# EAGLE board SAMD_Test_Board_old (EAGLE 9.6.2)
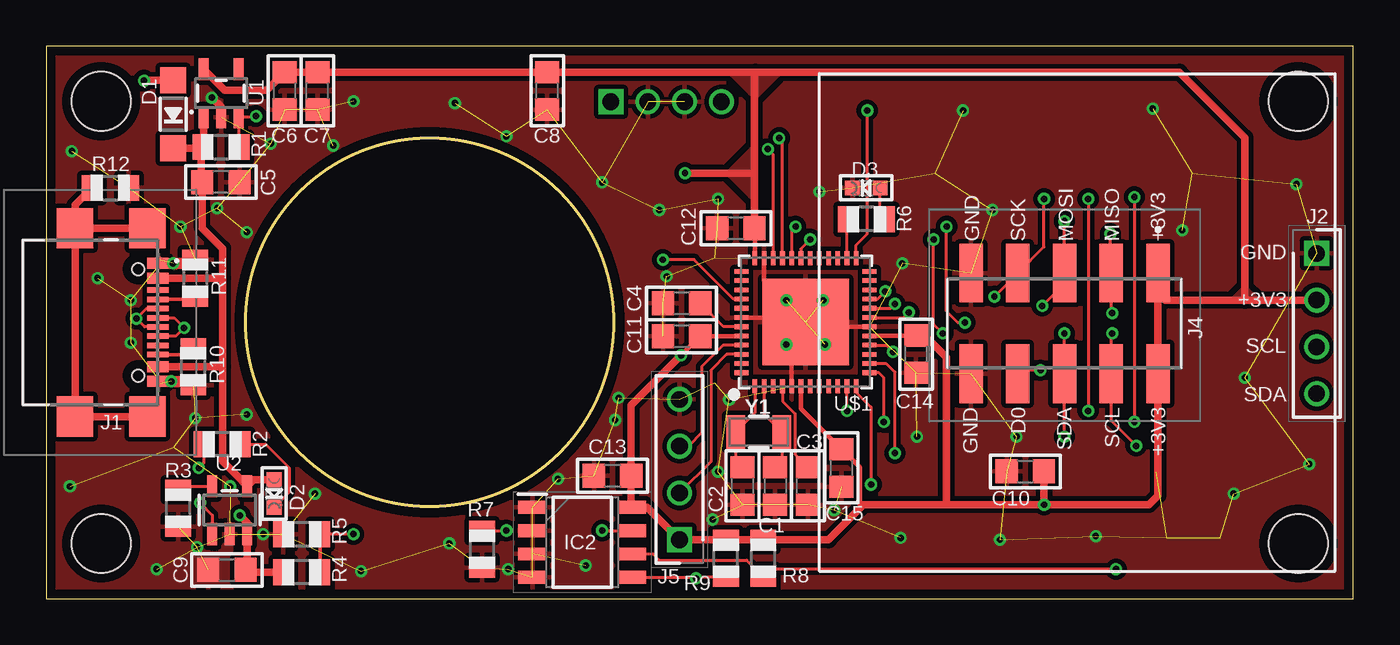
[diagram p0: board, top side]
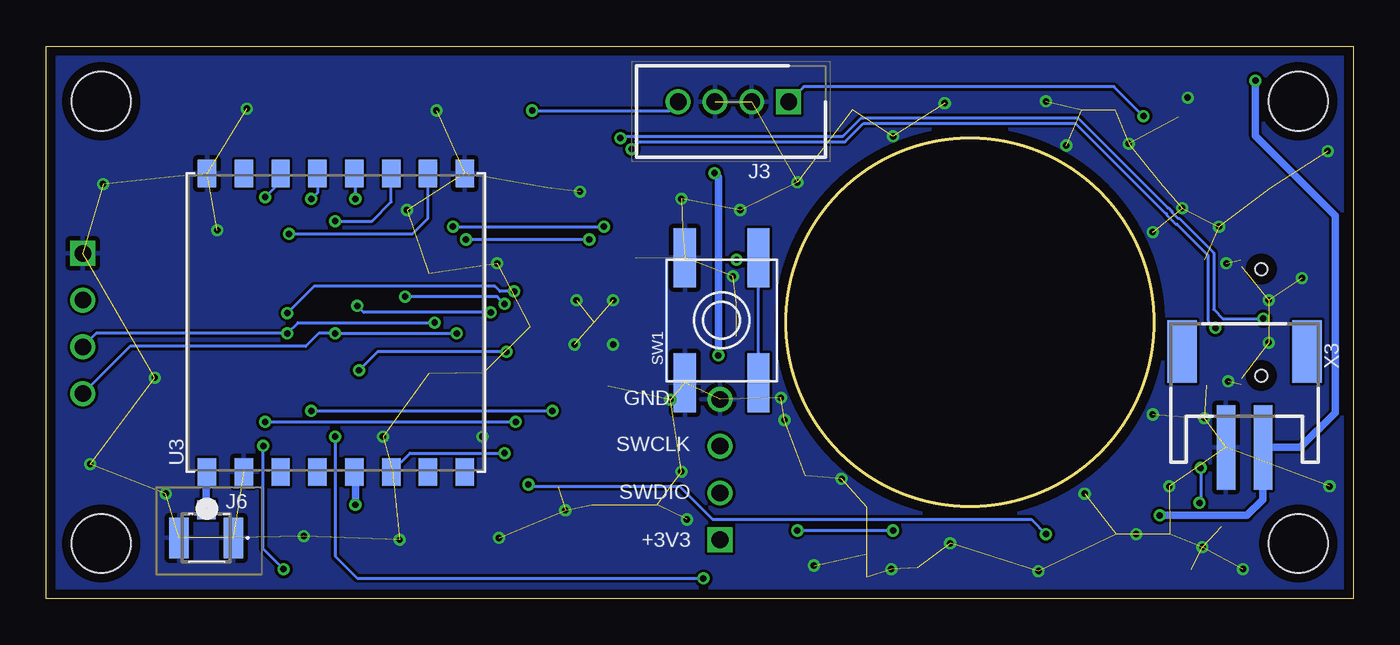
[diagram p1: board, bottom side, seen from below]

Size 71 x 30 mm. Coordinates in mm from the lower left corner, seen from the top.
Outline: 0,0 71,0 71,30 0,30 0,0
Outline: circle at 20.83,15 radius 10
Copper layers (1*16): Top 0.035mm / dielectric 1.6mm / Bottom 0.035mm
Design rules "Elecrow_2-layer_PCB_eagle_rule": minimum track width 6mil, minimum drill 12mil, track to track 6mil, track to pad 6mil, pad to pad 6mil, via to via 8mil, smd to smd 0mil, copper to edge 20mil, drill to drill 10mil, minimum pad ring 6mil, minimum via ring 6mil, stop-mask expansion 0mil, vias tented up to drill 100mil, thermal gap 10mil
Net classes: 0 default: width 0.152 mm; 1 USB_Diff_pair: width 0.152 mm; 2 Power: width 0.254 mm
Holes 3.2 mm at 3,3 3,27 68,27 68,3
tKeepout: area 0,24 to 6,30; area 0,0 to 6,6; area 65,24 to 71,30; area 65,0 to 71,6

## Footprints (pad centres in the part's own frame; a part is rotated, then mirrored left to right if it is on the bottom)
MICROBUILDER__0805 = smd 1.2 x 1.3: 1 -1.016,0; 2 1.016,0
MICROBUILDER_SOD-123 = smd 1.4 x 1.4: A 1.85,0; C -1.85,0
MICROBUILDER_CHIPLED_0603 = smd 0.8 x 0.8: A 0,-0.75; C 0,0.75
SOIC127P600X175-8N = smd 1.525 x 0.7: 1 -2.712,1.905; 2 -2.712,0.635; 3 -2.712,-0.635; 4 -2.712,-1.905; 5 2.712,-1.905; 6 2.712,-0.635; 7 2.712,0.635; 8 2.712,1.905
USB4110GFA = smd 0.3 x 1.15: A1 -3.35,3.678; A4 -2.55,3.678; A5 -1.25,3.678; A6 -0.25,3.678; A7 0.25,3.678; A8 1.25,3.678; A9 2.55,3.678; A12 3.35,3.678; B1 3.05,3.678; B4 2.25,3.678; B5 1.75,3.678; B6 0.75,3.678; B7 -0.75,3.678; B8 -1.75,3.678; B9 -2.25,3.678; B12 -3.05,3.678 | smd 2.18 x 2: MP1 -5.11,-0.827; MP2 5.11,-0.827; MP3 -5.11,3.103; MP4 5.11,3.103 | hole 0.65: -2.89,2.603; 2.89,2.603
RHDR4W70P0X254_1X4_1016X244X87 = drill 0.9 pad 1.35 square: 1 0,0 | drill 0.9 pad 1.35: 2 2.54,0; 3 5.08,0; 4 7.62,0
SHDR4W50P0X200_1X4_1000X470X63 = drill 0.9 pad 1.35 square: 1 0,0 | drill 0.9 pad 1.35: 2 2,0; 3 4,0; 4 6,0
10129383910001ALF = smd 1.27 x 3.18: A1 -5.08,-2.73; A2 -2.54,-2.73; A3 0,-2.73; A4 2.54,-2.73; A5 5.08,-2.73; B1 -5.08,2.73; B2 -2.54,2.73; B3 0,2.73; B4 2.54,2.73; B5 5.08,2.73
UFLRSMT10 = smd 1.05 x 2.2: 1 -1.475,0; 2 1.475,0 | smd 1 x 1.05: 3 0,-1.525
R0805 = smd 1.1 x 1.4: 1 -1,0; 2 1,0
ADAFRUIT_EVQ-Q2 = smd 3.2 x 1.2: A -3.4,-2; A' 3.4,-2; B -3.4,2; B' 3.4,2
SOT23-5 = smd 0.55 x 1.2: 1 -0.95,-1.3; 2 0,-1.3; 3 0.95,-1.3; 4 0.95,1.3; 5 -0.95,1.3
MICROBUILDER_SOT23-5 = smd 0.55 x 1.2: 1 -0.95,-1.3; 2 0,-1.3; 3 0.95,-1.3; 4 0.95,1.3; 5 -0.95,1.3
MICROBUILDER_RFMHCW_SMT = smd 1.5 x 1: 1P 8.1,-7; 2P 8.1,-5; 3P 8.1,-3; 4P 8.1,-1; 5P 8.1,1; 6P 8.1,3; 7P 8.1,5; 8P 8.1,7; 9P -8.1,7; 10P -8.1,5; 11P -8.1,3; 12P -8.1,1; 13P -8.1,-1; 14P -8.1,-3; 15P -8.1,-5; 16P -8.1,-7
MICROBUILDER_TQFN48_7MM = smd 0.25 x 0.75: 1 -2.75,-3.475; 2 -2.25,-3.475; 3 -1.75,-3.475; 4 -1.25,-3.475; 5 -0.75,-3.475; 6 -0.25,-3.475; 7 0.25,-3.475; 8 0.75,-3.475; 9 1.25,-3.475; 10 1.75,-3.475; 11 2.25,-3.475; 12 2.75,-3.475; 25 2.75,3.475; 26 2.25,3.475; 27 1.75,3.475; 28 1.25,3.475; 29 0.75,3.475; 30 0.25,3.475; 31 -0.25,3.475; 32 -0.75,3.475; 33 -1.25,3.475; 34 -1.75,3.475; 35 -2.25,3.475; 36 -2.75,3.475 | smd 0.75 x 0.25: 13 3.475,-2.75; 14 3.475,-2.25; 15 3.475,-1.75; 16 3.475,-1.25; 17 3.475,-0.75; 18 3.475,-0.25; 19 3.475,0.25; 20 3.475,0.75; 21 3.475,1.25; 22 3.475,1.75; 23 3.475,2.25; 24 3.475,2.75; 37 -3.475,2.75; 38 -3.475,2.25; 39 -3.475,1.75; 40 -3.475,1.25; 41 -3.475,0.75; 42 -3.475,0.25; 43 -3.475,-0.25; 44 -3.475,-0.75; 45 -3.475,-1.25; 46 -3.475,-1.75; 47 -3.475,-2.25; 48 -3.475,-2.75 | smd 4.7 x 4.7: THERMAL 0,0
MICROBUILDER_JSTPH2 = smd 1 x 4.6: 1 -1,-3.7; 2 1,-3.7 | smd 1.6 x 3.4: NC1 -3.4,1.5; NC2 3.4,1.5
CRYSTAL-SMD-3.2X1.5MM = smd 1 x 1.8: P$1 -1.25,0; P$2 1.25,0

## Placement (x,y rotation side)
C1  22pF  [MICROBUILDER__0805]  39.59,6.12 270 top
C2  22pF  [MICROBUILDER__0805]  37.81,6.12 270 top
C3  1uF  [MICROBUILDER__0805]  41.37,6.12 90 top
C4  1uF  [MICROBUILDER__0805]  34.51,16.03 180 top
C5  10uF  [MICROBUILDER__0805]  9.5,22.61 180 top
C6  10uF  [MICROBUILDER__0805]  12.96,27.57 90 top
C7  1uF  [MICROBUILDER__0805]  14.74,27.57 90 top
C8  10uF  [MICROBUILDER__0805]  27.22,27.57 90 top
C9  10uF  [MICROBUILDER__0805]  9.82,1.56 0 top
C10  10uF  [MICROBUILDER__0805]  53.18,6.91 0 top
C11  0.1uF  [MICROBUILDER__0805]  34.51,14.25 0 top
C12  0.1uF  [MICROBUILDER__0805]  37.46,20.11 0 top
C13  0.1uF  [MICROBUILDER__0805]  30.76,6.68 0 top
C14  0.1uF  [MICROBUILDER__0805]  47.25,13.27 90 top
C15  0.1uF  [MICROBUILDER__0805]  43.2,7.1 90 top
D1  MBR120  [MICROBUILDER_SOD-123]  6.91,26.3 90 top
D2  [MICROBUILDER_CHIPLED_0603]  12.39,5.71 180 top
D3  [MICROBUILDER_CHIPLED_0603]  44.55,22.3 90 top
IC2  CAT24C512WI-GT3  [SOIC127P600X175-8N]  29.12,3.06 0 top
J1  USB4110-GF-A  [USB4110GFA]  2.4,15 270 top
J2  90147-1104  [RHDR4W70P0X254_1X4_1016X244X87]  69,18.75 270 top
J3  M22-2200445  [SHDR4W50P0X200_1X4_1000X470X63]  30.68,26.98 180 bottom
J4  10129383-910001ALF  [10129383910001ALF]  55.31,14.94 180 top
J5  90147-1104  [RHDR4W70P0X254_1X4_1016X244X87]  34.4,3.2 90 top
J6  U.FL-R-SMT_10_  [UFLRSMT10]  62.3,3.3 180 bottom
R1  100k  [R0805]  9.5,24.52 0 top
R2  1k  [R0805]  9.56,8.38 180 top
R3  10k  [R0805]  7.18,4.91 90 top
R4  100k  [R0805]  13.88,1.44 180 top
R5  100k  [R0805]  13.88,3.5 0 top
R6  2.2K  [R0805]  44.55,20.6 180 top
R7  10k  [R0805]  23.68,2.69 90 top
R8  2.2k  [R0805]  38.95,2.2 90 top
R9  2.2k  [R0805]  36.92,2.2 90 top
R10  5.11K  [R0805]  8,12.6 90 top
R11  5.11K  [R0805]  8.1,17.4 270 top
R12  1M  [R0805]  3.5,22.3 0 top
SW1  ADAFRUIT_SPST_TACT-EVQQ2  [ADAFRUIT_EVQ-Q2]  34.31,15.11 270 bottom
U1  3.3V  [SOT23-5]  9.5,27.44 0 top
U2  MCP73831/2  [MICROBUILDER_SOT23-5]  9.97,4.81 0 top
U3  RFM95  [MICROBUILDER_RFMHCW_SMT]  55.26,14.98 270 bottom
U$1  MICROBUILDER_ATSAMD21J_QFN  [MICROBUILDER_TQFN48_7MM]  41.24,15.01 0 top
X3  [MICROBUILDER_JSTPH2]  5.92,11.91 0 bottom
Y1  32.768kHz  [CRYSTAL-SMD-3.2X1.5MM]  38.7,9.04 0 top

## Library data of the parts
C1-C15 D1-D3 R1-R7 R9-R12 SW1 U2 U3 U$1 X3 = Adafruit Feather M0 RFMxx
IC2 = SamacSys_Parts; DESCRIPTION: EEPROM,512kbit,64Kx8,1MHz I2C,SOIC8 ON Semiconductor CAT24C512WI-GT3 EEPROM Memory, 512kb, 400ns, 1.8 5.5 V 8-Pin SOIC; HEIGHT: 1.75mm; MANUFACTURER_NAME: ON Semiconductor; MANUFACTURER_PART_NUMBER: CAT24C512WI-GT3; MOUSER_PART_NUMBER: 863-CAT24C512WI-GT3; MOUSER_PRICE-STOCK: https://www.mouser.co.uk/ProductDetail/ON-Semiconductor/CAT24C512WI-GT3?qs=NJQfjRgVp6ROyXrGKjEjgQ%3D%3D
J1 = SamacSys_Parts; DESCRIPTION: CONN USB 2.0 TYPE-C R/A SMT; HEIGHT: 3.26mm; MANUFACTURER_NAME: GCT (GLOBAL CONNECTOR TECHNOLOGY); MANUFACTURER_PART_NUMBER: USB4110-GF-A; MOUSER_PART_NUMBER: 640-USB4110-GF-A; MOUSER_PRICE-STOCK: https://www.mouser.co.uk/ProductDetail/GCT/USB4110-GF-A?qs=KUoIvG%2F9IlYiZvIXQjyJeA%3D%3D
J2 J5 = SamacSys_Parts; DESCRIPTION: Headers & Wire Housings 2.54MM 4P PCB CONN SR VERTICAL; HEIGHT: 8.7mm; MANUFACTURER_NAME: Molex; MANUFACTURER_PART_NUMBER: 90147-1104; MOUSER_PART_NUMBER: 538-90147-1104; MOUSER_PRICE-STOCK: https://www.mouser.co.uk/ProductDetail/Molex/90147-1104?qs=QESXi79X%252BKpRACDRmfEx7Q%3D%3D
J3 = SamacSys_Parts; DESCRIPTION: 4 SIL VERT SHROUDED PIN HDR ROHS COMPLIANT: YES; HEIGHT: 6.35mm; MANUFACTURER_NAME: Harwin; MANUFACTURER_PART_NUMBER: M22-2200445; MOUSER_PART_NUMBER: 855-M22-2200445; MOUSER_PRICE-STOCK: https://www.mouser.co.uk/ProductDetail/Harwin/M22-2200445/?qs=p%252BybrH12zCH0J5aaSlth2Q%3D%3D
J4 = SamacSys_Parts; DESCRIPTION: EconoStik, Board to Board connector, Unshrouded Vertical Header, Surface Mount, Double Row, Positions, 2.54 mm (0.100in) Pitch.; HEIGHT: 9.85mm; MANUFACTURER_NAME: Amphenol; MANUFACTURER_PART_NUMBER: 10129383-910001ALF; MOUSER_PART_NUMBER: 649-1012938391001ALF; MOUSER_PRICE-STOCK: https://www.mouser.co.uk/ProductDetail/Amphenol-FCI/10129383-910001ALF?qs=0lQeLiL1qyY3dF%252BDHWxqLA%3D%3D
J6 = SamacSys_Parts; DESCRIPTION: RF Connectors / Coaxial Connectors U.FL RECEPTACLE SMT GLD M CONT REEL; HEIGHT: 1.25mm; MANUFACTURER_NAME: Hirose; MANUFACTURER_PART_NUMBER: U.FL-R-SMT(10); MOUSER_PART_NUMBER: 798-U.FL-R-SMT10; MOUSER_PRICE-STOCK: https://www.mouser.co.uk/ProductDetail/Hirose-Connector/UFL-R-SMT10?qs=Ux3WWAnHpjBT1CWD8UMEMQ%3D%3D
R8 = Adafruit Feather M0 RFMxx; MOUSER: CR0805-JW-202ELF
U1 = SamacSys_Parts; PROD_ID: VREG-12457
Y1 = SparkFun-Clocks; PROD_ID: XTAL-13062

## Nets
!RESET: SW1.B SW1.B' U$1.40
+3V3 [Power]: C6.2 C7.2 C8.2 C10.2 C11.2 C12.2 C13.2 C14.2 C15.2 IC2.8 J2.2 J4.A1 J4.B1 J5.1 R8.2 R9.2 U1.5 U3.5P U$1.6 U$1.17 U$1.36 U$1.44
A0: U$1.3
A1: U$1.7
A2: U$1.8
A3: U$1.9
A4: U$1.10
A5: U$1.47
AREF: C3.2 U$1.4
D0: J4.B4 U$1.16
D1: U$1.15
D2: U$1.23
D3_IRQ: U3.6P U$1.14
D4_RST: U3.14P U$1.13
D5: U$1.24
D6: U$1.29
D7: U$1.30
D8_CS: U3.13P U$1.11
D9: R4.1 R5.2 U$1.12
D10: U$1.27
D11: J3.4 U$1.25
D12: U$1.28
D13: R6.2 U$1.26
DIO1: U3.7P
DIO2: U3.8P
DIO3: U3.3P
DIO4: U3.4P
DIO5: U3.15P
EN: J3.1 R1.2 U1.3
GND [Power]: C1.2 C2.2 C3.1 C4.2 C5.1 C6.1 C7.1 C8.1 C9.1 C10.1 C11.1 C12.1 C13.1 C14.1 C15.1 D3.C IC2.1 IC2.2 IC2.3 IC2.4 J1.A1 J1.A12 J1.B1 J1.B12 J2.1 J3.2 J3.3 J4.A5 J4.B5 J5.4 J6.1 J6.2 R3.1 R5.1 R7.1 R10.1 R11.1 R12.2 SW1.A SW1.A' U1.2 U2.2 U3.2P U3.9P U3.16P U$1.5 U$1.18 U$1.35 U$1.42 U$1.THERMAL X3.1
MISO: J4.A2 U3.10P U$1.21
MOSI: J4.A3 U3.11P U$1.19
N$1: C2.1 U$1.1 Y1.P$1
N$2: C1.1 U$1.2 Y1.P$2
N$3: IC2.7 R7.2
N$4: C4.1 U$1.43
N$5: J1.A5 R11.2
N$6: D2.C R2.1
N$7: R2.2 U2.1
N$8: R3.2 U2.5
N$9: J1.B5 R10.2
N$10: J1.MP1 J1.MP2 J1.MP3 J1.MP4 R12.1
N$12: D3.A R6.1
N$13: J6.3 U3.1P
PA13: U$1.22
RXD: U$1.38
RXLED: U$1.48
SCK: J4.A4 U3.12P U$1.20
SCL: IC2.6 J2.3 J4.B2 R8.1 U$1.32
SDA: IC2.5 J2.4 J4.B3 R9.1 U$1.31
SWCLK: J5.3 U$1.45
SWDIO: J5.2 U$1.46
TXD: U$1.37
TXLED: U$1.39
USBD_N [USB_Diff_pair]: J1.A7 J1.B7 U$1.33
USBD_P [USB_Diff_pair]: J1.A6 J1.B6 U$1.34
USBHOSTEN: U$1.41
VBAT [Power]: C9.2 D1.A R4.2 U2.3 X3.2
VBUS [Power]: C5.2 D1.C D2.A J1.A4 J1.A9 J1.B4 J1.B9 R1.1 U1.1 U2.4

## Tracks (layer width: path | path; a pad name or v marks a point on that pad's centre or on a via)
!RESET  (via drill 0.35)
  Top 0.152: U$1.40 37.34,16.26 35.2,18.4 v33.5,18.4
  Bottom 0.152: v33.5,18.4 32.42,18.4 | 32.42,18.4 32.51,18.31 32.31,18.11 SW1.B' | 32.42,18.4 SW1.B
+3V3  (via drill 0.35)
  Top 0.254: U$1.17 47.23,14.26 C14.2 | U$1.44 37.76,14.25 C11.2 v34.49,13.21 | U$1.6 40.99,10.32 C15.2 44.19,7.12 44.19,5.95 44.2,5.94 44.2,4.9 | U$1.36 38.49,20.1 C12.2 | 38.48,28.57 38.5,28.59
  Top 0.406: U1.5 9.69,27.6 11.97,27.6 C6.2 C7.2 C8.2 38.5,28.59 61.54,28.59 65.1,25.03 65.1,16.2 | J4.A1 60.39,16.6 | 60.39,16.6 J4.B1 60.39,5.59 59.9,5.1 v54.2,5.1 | v54.2,5.1 C10.2 | 48.9,5.1 48.9,13.1 47.74,14.26 47.23,14.26 | v54.2,5.1 48.9,5.1 | 48.9,5.1 44.4,5.1 44.2,4.9 42.5,3.2 R8.2 R9.2 J5.1 32.63,4.97 IC2.8 31.78,5.02 C13.2 31.78,10.5 v34.49,13.21 | 65.1,16.2 60.79,16.2 60.39,16.6 | C12.2 38.48,23.1 | 38.48,23.1 38.48,28.57 | J2.2 65.11,16.21 65.1,16.2 | 38.48,23.1 v34.7,23.1
  Bottom 0.406: U3.5P 54.2,6.82 v54.2,5.1 | v34.7,23.1 34.49,22.89 v34.49,13.21
  pour Top: 65.1,17 64.3,16.2 65.8,16.2 65.9,16.2
  pour Top: 38.5,27.2 39.9,28.6 37.3,28.6 37.1,28.6
  pour Top (no thermals): 38.5,21.6 37,23.1 38.5,24.6
AREF
  Top 0.152: U$1.4 39.99,10.73 40.68,10.04 40.68,7.83 C3.2
D0  (via drill 0.35)
  Top 0.152: U$1.16 45.64,13.76 v46,13.4 | v54,12.4 52.96,12.4 J4.B4
  Bottom 0.152: v46,13.4 53,13.4 v54,12.4
D3_IRQ  (via drill 0.35)
  Top 0.152: v46.1,7.9 46.1,12.3 45.64,12.76 U$1.14
  Bottom 0.152: U3.6P 51.24,7.9 v46.1,7.9
D4_RST  (via drill 0.35)
  Top 0.152: v59.1,21.8 v59.1,9.6 | v45.5,9.6 45.5,12 45.24,12.26 U$1.13
  Bottom 0.152: U3.14P 58.26,22.64 v59.1,21.8 | v59.1,9.6 v45.5,9.6
D8_CS  (via drill 0.35)
  Top 0.152: v43.5,10.2 U$1.11 | v56.6,21.7 v56.6,10.2
  Bottom 0.152: U3.13P 56.26,22.04 v56.6,21.7 | v56.6,10.2 v43.5,10.2
D9  (via drill 0.35)
  Top 0.152: U$1.12 43.99,11.21 44.8,10.4 v44.8,6.2 | v16.7,3.5 R5.2
  Top 0.203: R4.1 R5.2
  Bottom 0.152: v44.8,6.2 44.7,6.1 36.6,6.1 34.8,4.3 17.5,4.3 v16.7,3.5
D11  (via drill 0.35)
  Top 0.152: U$1.25 43.99,19.19 44.6,19.8 v44.6,26.5
  Bottom 0.152: v44.6,26.5 37.15,26.5 J3.4
D13
  Top 0.152: U$1.26 43.49,20.55 R6.2
EN  (via drill 0.35)
  Top 0.152: v11.4,26.2 11.34,26.14 U1.3 10.45,24.57 R1.2
  Bottom 0.152: v11.4,26.2 13,27.8 29.85,27.8 J3.1
GND  (via drill 0.35)  (97 unrouted)
  Top 0.254: U$1.42 40.99,15.26 U$1.THERMAL | U$1.18 41.49,14.76 U$1.THERMAL | U$1.35 38.99,17.26 U$1.THERMAL | U$1.5 40.49,13.51 v40.2,13.8 40.2,13.97 U$1.THERMAL
  Top 0.305: J1.B12 7.75,18.05 | J1.A1 7.95,18.35 8,18.3 | J1.A12 7.95,11.65 | 7.95,11.65 R10.1 | J1.B1 7.65,11.95 7.95,11.65
  Top 0.406: U1.2 9.5,26.7 v9,27.2 | 6.13,18.4 J1.A1 | 7.75,18.05 8,18.3 R11.1
  other vias: 10,6.1 8.1,9.8 4.6,13.9 7.3,20.2 4.6,16.2 25.1,1.6 9.3,21.2 1.4,24.3 12.2,24.7 8.2,2.8 1.3,6.1 11.8,3.5 40.2,16.2 42.2,16.2 42.3,13.8 33.7,17.5 25,25.1 15.6,24.6 30.2,22.6 31.1,10.9 36.5,21.7 46.5,18.2 42.8,4.8 52.7,8.8 61.7,20 51.4,21.1 67.9,22.5 60.1,26.6 49.8,26.5 65.1,12 68.6,7.3 64.5,5.7 57,3.4 51.8,3.2 46.4,3.3 47.3,8.8 14.6,5.7 10.9,10 30.9,9.7 27.8,6.5 21.9,3 17.1,1.5 29.3,1.8 6,1.6 2.8,17.4 6.8,11.8 6.9,18.2 36.2,4.3 36.5,6.9 37.1,10.8 33.3,21.1 42,22.1 16.7,27 22.2,26.9 10.9,19.9
  pour Top (isolate 0.254, rank 6): 0,30 0,0 71,0 71,30
  pour Bottom (rank 6): 0,30 0,0 71,0 71,30
  pour Top (no thermals): 9.8,3.1 9.6,2.9 9.6,2.7 9.4,2.5 7.9,2.5 7.9,0.7 9.9,0.7 9.9,2.3 10.1,2.5 10.1,3.1
MISO  (via drill 0.35)
  Top 0.152: v57.8,19.8 57.8,17.72 J4.A2 57.85,15.55 v57.9,15.5 | U$1.21 45.15,16.26 v45.57,16.69
  Bottom 0.152: v57.8,19.8 51.1,19.8 50.26,20.64 U3.10P | v45.57,16.69 46.36,16.69 46.62,16.96 56.44,16.96 v57.9,15.5
MOSI  (via drill 0.35)
  Top 0.152: v55.3,20.5 v55.31,20.49 J4.A3 55.31,17.11 v54.1,15.9 | U$1.19 46.58,15.26 v46.86,15.54
  Bottom 0.152: v55.3,20.5 53.3,20.5 52.26,21.54 U3.11P | v46.86,15.54 53.74,15.54 v54.1,15.9
N$1
  Top 0.152: U$1.1 38.49,10.09 Y1.P$1 37.45,7.5 C2.1
N$2
  Top 0.152: U$1.2 38.99,10.01 Y1.P$2 39.95,7.5 C1.1
N$3  (via drill 0.35)
  Top 0.152: R7.2 24.99,3.69 v25,3.7 | v30.2,3.7 IC2.7
  Bottom 0.152: v25,3.7 v30.2,3.7
N$4
  Top 0.152: U$1.43 36.8,14.76 C4.1
N$5
  Top 0.2: J1.A5 7.95,16.25 R11.2
N$6
  Top 0.152: R2.1 11.92,8.38 13.2,7.1 13.2,5.77 D2.C
  Top 0.203: 12.65,4.7 D2.C
N$7  (via drill 0.35)
  Top 0.152: R2.2 8.56,7.36 v8.3,7.1 | v8.36,5.2 9.02,4.54 U2.1
  Bottom 0.152: v8.3,7.1 8.3,5.26 v8.36,5.2
N$8
  Top 0.152: R3.2 7.38,6.11 U2.5
N$9
  Top 0.2: J1.B5 7.65,13.25 R10.2
N$10
  Top 0.406: J1.MP4 J1.MP2 J1.MP1 | J1.MP3 J1.MP1 | R12.1 1.57,21.37 J1.MP1
N$12
  Top 0.152: R6.1 45.3,20.85 D3.A
N$13
  Bottom 0.406: J6.3 62.3,6.84 U3.1P
SCK  (via drill 0.35)
  Top 0.152: v54.2,21.7 54.2,19.1 J4.A4 v51.5,16.4 | U$1.20 45.86,15.76 v46.1,16
  Bottom 0.152: v54.2,21.7 54.2,23.02 U3.12P | v46.1,16 46.5,16.4 v51.5,16.4
SCL  (via drill 0.35)
  Top 0.152: v57.9,14.4 57.85,14.35 J4.B2 57.85,9.65 v59.2,8.3 | v49.9,14.99 49.51,14.99 48.9,15.6 v48.9,20.2 | v40.7,20.2 40.49,19.99 U$1.32 | IC2.6 32.97,2.43 33.3,2.1 38.05,2.1 R8.1 39.35,1.6 v58.1,1.6
  Bottom 0.152: J2.3 68.27,14.4 v57.9,14.4 57.31,14.99 v49.9,14.99 | v59.2,8.3 59.2,2.7 v58.1,1.6 | v48.9,20.2 v40.7,20.2
SDA  (via drill 0.35)
  Top 0.152: v55.3,14.4 v55.31,14.39 J4.B3 v55.3,8.8 | 37.38,1.2 R9.1 36.88,1.16 35.24,1.16 | v48.7,14.4 48.2,14.9 v48.2,19.5 | v41.5,19.5 40.99,18.99 U$1.31 | IC2.5 35.24,1.16 | 35.24,1.16 v35.3,1.1
  Bottom 0.152: J2.4 66.43,13.7 56.9,13.7 56.2,14.4 v55.3,14.4 v48.7,14.4 | v55.3,8.8 55.3,2.3 54.1,1.1 v35.3,1.1 | v48.2,19.5 v41.5,19.5
SWCLK
  Top 0.152: U$1.45 36.76,13.76 35.6,12.6 35.6,9 34.88,8.28 J5.3
SWDIO
  Top 0.152: U$1.46 36.96,13.26 36.1,12.4 36.1,7.44 J5.2
USBD_N  (via drill 0.35)
  Top 0.152: v39.81,25.01 39.99,24.82 U$1.33 | J1.A7 5.35,14.75 v4.9,15.2 5.45,15.75 J1.B7
  Bottom 0.152: v39.81,25.01 39.71,25.11 27.73,25.11 26.73,26.11 14.97,26.11 10.08,21.21 10.04,21.21 9.86,21.04 | 9.86,21.04 | v4.9,15.2 7.09,15.2 7.59,15.7 7.59,18.77 9.46,20.64 9.53,20.64 9.86,20.97 9.86,21.02 9.86,21.04
USBD_P  (via drill 0.35)
  Top 0.152: v39.2,24.4 39.49,24.11 U$1.34 | J1.B6 7.05,14.25 v7.5,14.7 6.95,15.25 J1.A6
  Bottom 0.152: v39.2,24.4 38.8,24.8 27.6,24.8 26.6,25.8 15.1,25.8 10.16,20.86 | 10.16,20.91 10.16,20.86 | v7.5,14.7 7.9,15.1 7.9,18.65 9.59,20.34 9.66,20.34 10.11,20.79 10.16,20.84 10.16,20.86
VBAT  (via drill 0.35)
  Top 0.406: R4.2 10.96,1.44 C9.2 10.92,1.65 U2.3 10.92,4.11 v10.52,4.52 | 6.75,28.3 D1.A 5.35,28.15 v5.32,28.12
  Bottom 0.406: v10.52,4.52 5.78,4.52 4.92,5.38 X3.2 | 5.2,7.93 X3.2 | v5.32,28.12 5.32,25.12 1,20.8 1,10.1 2.89,8.21 X3.2
VBUS
  Top 0.254: J1.A4 J1.B9 | 6.23,12.6 J1.B4 J1.A9
  Top 0.305: J1.A4 6.23,17.4
  Top 0.406: D2.A 11.27,6.46 U2.4 10.68,6.35 10.68,6.38 9.6,7.47 9.6,12.6 | 6.23,12.6 9.6,12.6 | D1.C 8.43,24.45 | 8.43,24.45 R1.1 8.55,24.57 U1.1 | 8.43,24.45 8.43,22.67 C5.2 8.49,20.11 9.6,19 9.6,17.4 | 9.6,12.6 9.6,17.4 | 6.23,17.4 9.6,17.4

## Text on the board
tNames: GND | SCK | MOSI | MISO | +3V3 | GND | +3V3 | SCL | SDA | GND | D0 | SDA | SCL | +3V3 | PA13 | D1 | A5 | A4 | A3 | A2 | A1 | A0 | AREF | !RESET | D3 | DIO1 | DIO2 | DIO3 | GND | SWDIO | DIO4 | DIO5 | SWCLK | D4_RST | D8_CS | RXLED | TXLED | RXD | TXD | D5 | D6 | D9 | D10 | D11 | D12 | D13 | VBUS | EN | VBAT
bNames: GND | SWCLK | SWDIO | +3V3